# Altium PCB PCB1.PcbDoc (part 3 of 5)
Units mil, origin at the board's own origin, x right, y up, seen from the top; angles counter-clockwise.
Board outline 1280 x 1960 mil, 2 copper layers (Top Layer, Bottom Layer); 43 components, 63 nets, 300 pads, 93 vias.
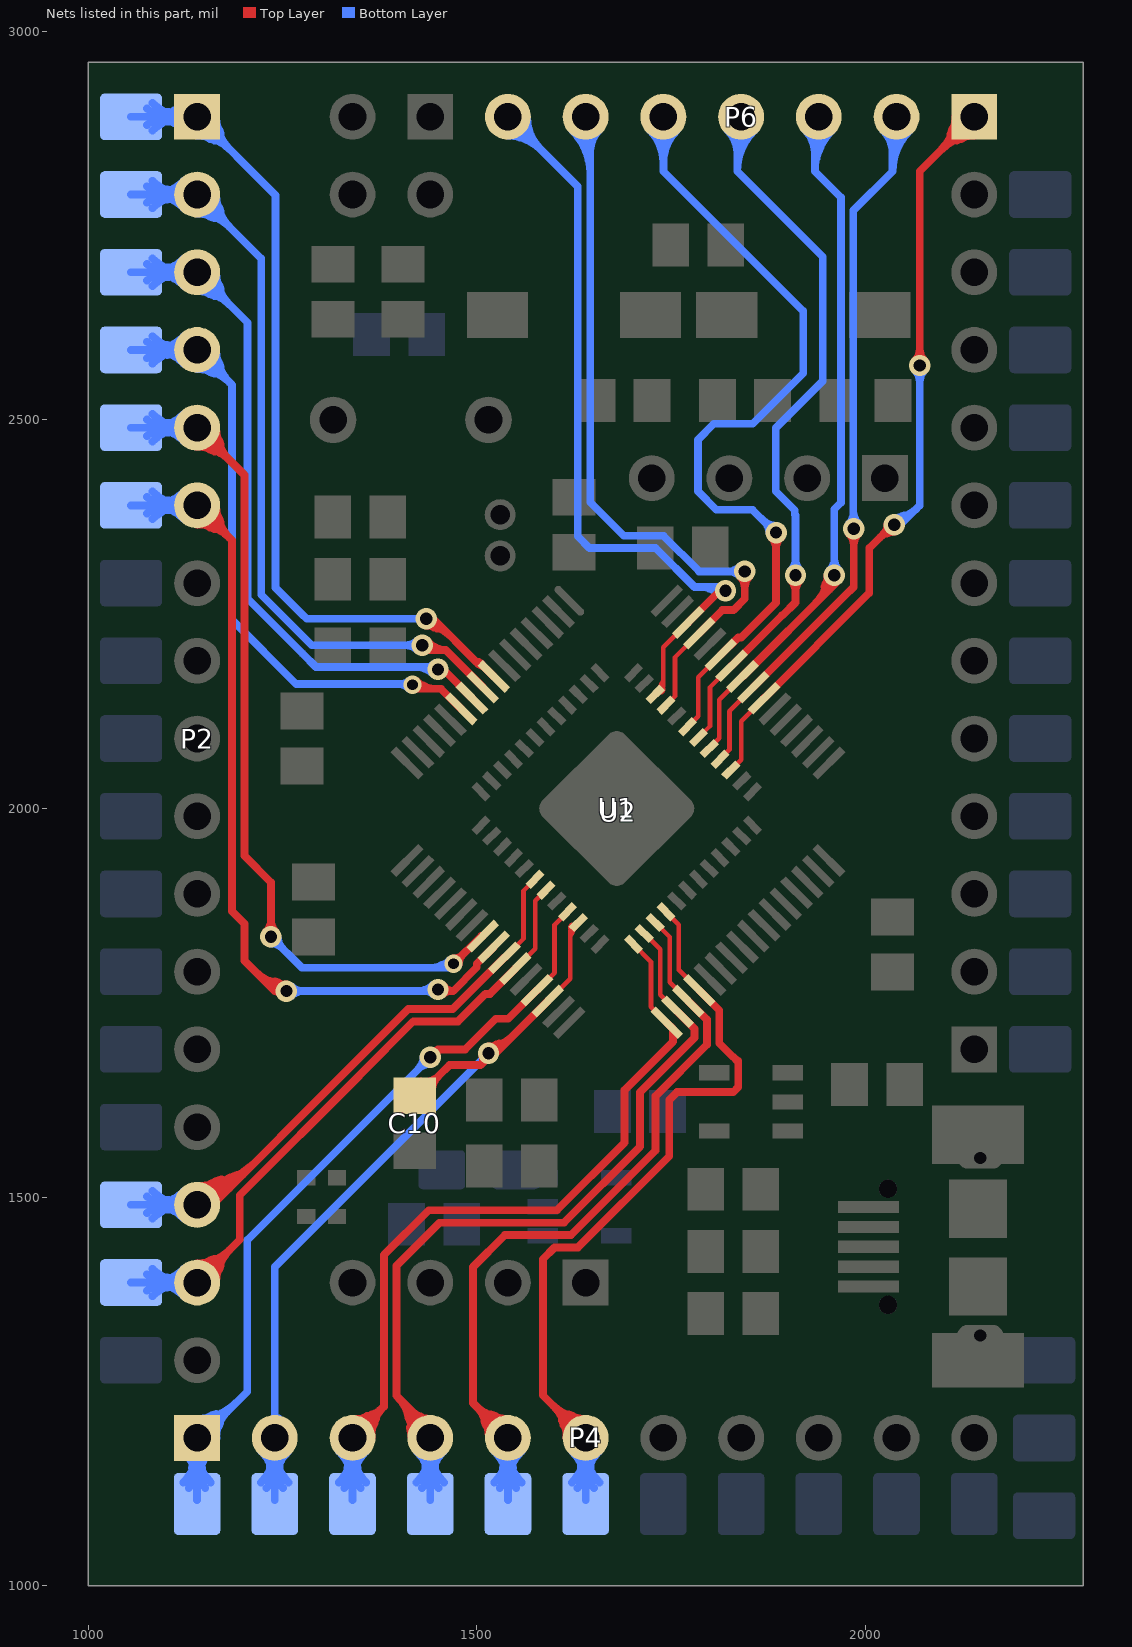
[diagram p3: the nets of this part, all layers, seen from the top]

## Via types
v1: diameter 27.56, hole 15.75, Top Layer to Bottom Layer, tented both sides, 87 vias
v2: diameter 23.62, hole 13.78, Top Layer to Bottom Layer, tented both sides, 6 vias

## Nets (pads, with @x,y where several pads share a name; then routed paths per layer and width w, separated by ;. In a path a pad name is that pad's centre, name@x,y a point inside that pad or via, vN(x,y) a via of type N, cw(c..) or ccw(c..) an arc to the next point about the centre after c; other vN are vias at no path point) (continued)
PB0: P2.15 pad.1@1055,1490 U1.18 U2.26 | length 2203.2
  Top Layer w6: U2.26@1535.52,1807.9 1560,1832.38 1560,1893.92 U1.18@1574.91,1908.83
  Top Layer w10: P2.15@1135.03,1492.3 cw(c1186.01,1468.71) 1171.47,1522.96 ; P2.15@1140,1490 1160,1490 1333,1663 1333,1663.25 1411.75,1742 1469.07,1742 1534.97,1807.9 U2.26@1535.52,1807.9 ; P2.15@1144.11,1488.1 cw(c1211.26,1457.02) 1192.11,1528.49 ; P2.15@1144.3,1488.59 cw(c1178.9,1477.26) 1169.48,1512.43 ; P2.15@1140,1494.53 ccw(c1140,1553.74) 1181.87,1511.87 cw(c1140,1553.74) P2.15@1140,1494.53 ; P2.15@1140,1504.53 ccw(c1140,1587.88) 1198.94,1528.94 cw(c1140,1587.88) P2.15@1140,1504.53 ; P2.15@1140,1514.53 ccw(c1140,1622.03) 1216.01,1546.01 cw(c1140,1622.03) P2.15@1140,1514.53
  Bottom Layer w10: pad.1@1055,1490 P2.15@1140,1490 ; P2.15@1116.78,1482.1 ccw(c1095.78,1474.96) 1101.52,1496.39 ccw(c1105.72,1512.07) P2.15@1119.38,1503.28 ; P2.15@1116.78,1497.9 cw(c1095.78,1505.04) 1101.52,1483.61 cw(c1105.72,1467.93) P2.15@1119.38,1476.72 ; pad.1@1080.79,1490 cw(c1080.79,1430.79) 1122.66,1472.66 ccw(c1080.79,1430.79) pad.1@1080.79,1490 ; pad.1@1080.79,1490 ccw(c1080.79,1549.21) 1122.66,1507.34 cw(c1080.79,1549.21) pad.1@1080.79,1490 ; pad.1@1086.36,1477.01 cw(c1099.56,1468.97) 1103.56,1483.9 ; pad.1@1086.36,1477.01 cw(c1099.56,1468.97) 1103.56,1483.9 ; pad.1@1086.36,1477.01 cw(c1099.56,1468.97) 1103.56,1483.9 ; pad.1@1086.36,1502.99 ccw(c1099.56,1511.03) 1103.56,1496.1 ; pad.1@1086.36,1502.99 ccw(c1099.56,1511.03) 1103.56,1496.1 ; pad.1@1086.36,1502.99 ccw(c1099.56,1511.03) 1103.56,1496.1 ; pad.1@1088.73,1482.12 cw(c1109.12,1475.35) 1103.56,1496.1 ; pad.1@1088.73,1482.12 cw(c1109.12,1475.35) 1103.56,1496.1 ; pad.1@1088.73,1482.12 cw(c1109.12,1475.35) 1103.56,1496.1 ; pad.1@1088.73,1497.88 ccw(c1109.12,1504.65) 1103.56,1483.9 ; pad.1@1088.73,1497.88 ccw(c1109.12,1504.65) 1103.56,1483.9 ; pad.1@1088.73,1497.88 ccw(c1109.12,1504.65) 1103.56,1483.9 ; 1101.21,1490 cw(c1101.21,1526.21) 1075.61,1500.61 ccw(c1101.21,1526.21) 1101.21,1490 ; 1101.21,1490 ccw(c1101.21,1453.79) 1075.61,1479.39 cw(c1101.21,1453.79) 1101.21,1490 ; 1104.93,1490 cw(c1104.93,1454.93) 1129.73,1479.73 ccw(c1104.93,1454.93) 1104.93,1490 ; 1104.93,1490 ccw(c1104.93,1525.07) 1129.73,1500.27 cw(c1104.93,1525.07) 1104.93,1490 ; P2.15@1125.36,1490 cw(c1125.36,1550.36) 1082.68,1507.68 ccw(c1125.36,1550.36) P2.15@1125.36,1490 ; P2.15@1125.36,1490 ccw(c1125.36,1429.64) 1082.68,1472.32 cw(c1125.36,1429.64) P2.15@1125.36,1490
PB1: P2.16 pad.1@1055,1390 U1.19 U2.27 | length 2124.8
  Top Layer w6: U2.27@1549.44,1793.98 1575,1819.54 1575,1881.08 U1.19@1588.83,1894.91
  Top Layer w10: P2.16@1134.64,1391.1 cw(c1172.3,1383.39) 1162.35,1420.52 ; P2.16@1140,1390 1195,1445 1195,1502.37 1349,1656.37 1349,1656.63 1418.37,1726 1475.7,1726 1511.03,1761.32 1516.79,1761.32 U2.27@1549.44,1793.98 ; P2.16@1141.1,1384.64 ccw(c1133.39,1422.3) 1170.52,1412.35 ; 1164.8,1414.8 cw(c1140,1439.6) 1140,1404.53 ccw(c1140,1439.6) 1164.8,1414.8 ; 1164.8,1414.8 ccw(c1189.6,1390) 1154.53,1390 cw(c1189.6,1390) 1164.8,1414.8 ; 1181.87,1431.87 cw(c1140,1473.74) 1140,1414.53 ccw(c1140,1473.74) 1181.87,1431.87 ; 1181.87,1431.87 ccw(c1223.74,1390) 1164.53,1390 cw(c1223.74,1390) 1181.87,1431.87
  Bottom Layer w10: pad.1@1055,1390 P2.16@1140,1390 ; P2.16@1116.78,1382.1 ccw(c1095.78,1374.96) 1101.52,1396.39 ccw(c1105.72,1412.07) P2.16@1119.38,1403.28 ; P2.16@1116.78,1397.9 cw(c1095.78,1405.04) 1101.52,1383.61 cw(c1105.72,1367.93) P2.16@1119.38,1376.72 ; pad.1@1080.79,1390 cw(c1080.79,1330.79) 1122.66,1372.66 ccw(c1080.79,1330.79) pad.1@1080.79,1390 ; pad.1@1080.79,1390 ccw(c1080.79,1449.21) 1122.66,1407.34 cw(c1080.79,1449.21) pad.1@1080.79,1390 ; pad.1@1086.36,1377.01 cw(c1099.56,1368.97) 1103.56,1383.9 ; pad.1@1086.36,1377.01 cw(c1099.56,1368.97) 1103.56,1383.9 ; pad.1@1086.36,1377.01 cw(c1099.56,1368.97) 1103.56,1383.9 ; pad.1@1086.36,1402.99 ccw(c1099.56,1411.03) 1103.56,1396.1 ; pad.1@1086.36,1402.99 ccw(c1099.56,1411.03) 1103.56,1396.1 ; pad.1@1086.36,1402.99 ccw(c1099.56,1411.03) 1103.56,1396.1 ; pad.1@1088.73,1382.12 cw(c1109.12,1375.35) 1103.56,1396.1 ; pad.1@1088.73,1382.12 cw(c1109.12,1375.35) 1103.56,1396.1 ; pad.1@1088.73,1382.12 cw(c1109.12,1375.35) 1103.56,1396.1 ; pad.1@1088.73,1397.88 ccw(c1109.12,1404.65) 1103.56,1383.9 ; pad.1@1088.73,1397.88 ccw(c1109.12,1404.65) 1103.56,1383.9 ; pad.1@1088.73,1397.88 ccw(c1109.12,1404.65) 1103.56,1383.9 ; 1101.21,1390 cw(c1101.21,1426.21) 1075.61,1400.61 ccw(c1101.21,1426.21) 1101.21,1390 ; 1101.21,1390 ccw(c1101.21,1353.79) 1075.61,1379.39 cw(c1101.21,1353.79) 1101.21,1390 ; 1104.93,1390 cw(c1104.93,1354.93) 1129.73,1379.73 ccw(c1104.93,1354.93) 1104.93,1390 ; 1104.93,1390 ccw(c1104.93,1425.07) 1129.73,1400.27 cw(c1104.93,1425.07) 1104.93,1390 ; P2.16@1125.36,1390 cw(c1125.36,1450.36) 1082.68,1407.68 ccw(c1125.36,1450.36) P2.16@1125.36,1390 ; P2.16@1125.36,1390 ccw(c1125.36,1329.64) 1082.68,1372.32 cw(c1125.36,1329.64) P2.16@1125.36,1390
PB3: P6.1 U1.39 U2.55 | length 1661.6
  Top Layer w6: U1.39@1826.85,2049.41 1840,2062.56 1840,2112.37 U2.55@1869.59,2141.96
  Top Layer w10: U2.55@1869.59,2141.96 2005,2277.37 2005,2335 v1@2035,2365 ; 2026.83,2353.5 ccw(c2022.66,2369.08) v1@2038.17,2364.67 ; v1(2070,2570) 2070,2820 P6.1@2140,2890 ; 2109.48,2867.65 cw(c2146.61,2857.7) P6.1@2138.9,2895.36 ; 2117.65,2859.48 ccw(c2107.7,2896.61) P6.1@2145.36,2888.9 ; 2070,2591.2 cw(c2048.8,2591.2) 2063.79,2576.21 ccw(c2048.8,2591.2) 2070,2591.2 ; 2070,2591.2 ccw(c2091.2,2591.2) 2076.21,2576.21 cw(c2091.2,2591.2) 2070,2591.2 ; 2098.13,2848.13 cw(c2140,2806.26) 2140,2865.47 ccw(c2140,2806.26) 2098.13,2848.13 ; 2098.13,2848.13 ccw(c2056.26,2890) 2115.47,2890 cw(c2056.26,2890) 2098.13,2848.13 ; P6.1@2115.2,2865.2 cw(c2140,2840.4) 2140,2875.47 ccw(c2140,2840.4) P6.1@2115.2,2865.2 ; P6.1@2115.2,2865.2 ccw(c2090.4,2890) 2125.47,2890 cw(c2090.4,2890) P6.1@2115.2,2865.2 ; 2018.6,2348.6 cw(c2037,2330.2) 2037,2356.22 ccw(c2037,2330.2) 2018.6,2348.6 ; 2023.43,2353.43 ccw(c2011.85,2365) 2028.22,2365 cw(c2011.85,2365) 2023.43,2353.43
  Bottom Layer w10: v1@2035,2365 2045,2365 2070,2390 v1(2070,2570) v1@2070,2575 ; v1@2035.9,2365.54 cw(c2056.01,2355.7) 2050.21,2377.32 ; 2070,2548.8 cw(c2091.2,2548.8) 2076.21,2563.79 ccw(c2091.2,2548.8) 2070,2548.8 ; 2070,2548.8 ccw(c2048.8,2548.8) 2063.79,2563.79 cw(c2048.8,2548.8) 2070,2548.8 ; v1@2037,2373.78 ccw(c2037,2414.29) 2065.64,2385.64 cw(c2037,2414.29) v1@2037,2373.78
  other v1: 2037,2365
PB4: P6.2 U1.40 U2.56 | length 1311.1
  Top Layer w6: U1.40@1812.93,2063.33 1825,2075.4 1825,2125.21 U2.56@1855.67,2155.88
  Top Layer w10: U2.56@1855.67,2155.88 1980,2280.21 1980.21,2280.21 1985,2285 v1(1985,2360) ; 1985,2338.8 cw(c2006.2,2338.8) 1991.21,2353.79 ccw(c2006.2,2338.8) 1985,2338.8 ; 1985,2338.8 ccw(c1963.8,2338.8) 1978.79,2353.79 cw(c1963.8,2338.8) 1985,2338.8
  Bottom Layer w10: v1(1985,2360) 1984.47,2360.53 1984.47,2769.47 2035,2820 P6.2@2035,2885 ; v1@1978.79,2366.21 ccw(c1965.08,2379.92) 1984.47,2379.92 cw(c1965.08,2379.92) v1@1978.79,2366.21 ; 1984.47,2382.47 ccw(c2007.47,2382.47) 1991.21,2366.21 cw(c2007.47,2382.47) 1984.47,2382.47 ; P6.2@2022.66,2872.66 cw(c1992.86,2842.86) 2035,2842.86 ccw(c1992.86,2842.86) P6.2@2022.66,2872.66 ; 2035,2819.83 cw(c2108.62,2819.83) 2057.15,2872.46 ccw(c2108.62,2819.83) 2035,2819.83 ; 2035,2843.59 cw(c2085.38,2843.59) 2050.16,2879.61 ccw(c2085.38,2843.59) 2035,2843.59
PB5: P6.3 U1.41 U2.57 | length 1359.7
  Top Layer w6: U1.41@1799.01,2077.25 1812,2090.24 1812,2140.05 U2.57@1841.75,2169.8
  Top Layer w10: U2.57@1841.75,2169.8 v1@1961.95,2290 ; 1947.27,2285.27 cw(c1972.39,2278.53) v1@1959.39,2301.06 ; 1936.56,2264.62 ccw(c1901.18,2300) 1951.22,2300 cw(c1901.18,2300) 1936.56,2264.62 ; 1953.64,2281.69 ccw(c1935.32,2300) 1961.22,2300 cw(c1935.32,2300) 1953.64,2281.69
  Bottom Layer w10: P6.3@1940,2890 1935,2885 1935,2820 1968.47,2786.53 1968.47,2393.47 1960,2385 v1(1960,2300) ; 1960,2321.2 cw(c1938.8,2321.2) 1953.79,2306.21 ccw(c1938.8,2321.2) 1960,2321.2 ; 1960,2321.2 ccw(c1981.2,2321.2) 1966.21,2306.21 cw(c1981.2,2321.2) 1960,2321.2 ; P6.3@1922.66,2872.66 cw(c1892.86,2842.86) 1935,2842.86 ccw(c1892.86,2842.86) P6.3@1922.66,2872.66 ; 1935,2819.83 cw(c2008.62,2819.83) 1957.15,2872.46 ccw(c2008.62,2819.83) 1935,2819.83 ; 1935,2843.59 cw(c1985.38,2843.59) 1950.16,2879.61 ccw(c1985.38,2843.59) 1935,2843.59
PB6: P6.4 U1.42 U2.58 | length 1331.3
  Top Layer w6: U1.42@1785.09,2091.17 1800,2106.08 1800,2155.89 U2.58@1827.83,2183.72
  Top Layer w10: U2.58@1827.83,2183.72 1892.78,2248.67 1893.67,2248.67 1910,2265 v1(1910,2300) ; 1910,2278.8 cw(c1931.2,2278.8) 1916.21,2293.79 ccw(c1931.2,2278.8) 1910,2278.8 ; 1910,2278.8 ccw(c1888.8,2278.8) 1903.79,2293.79 cw(c1888.8,2278.8) 1910,2278.8
  Bottom Layer w10: P6.4@1840,2890 1835,2885 1835,2820 1945,2710 1945,2550 1884.47,2489.47 1884.47,2408.21 1909,2383.69 1909,2378.37 1910,2377.37 v1(1910,2300) ; 1910,2321.2 cw(c1888.8,2321.2) 1903.79,2306.21 ccw(c1888.8,2321.2) 1910,2321.2 ; 1910,2321.2 ccw(c1931.2,2321.2) 1916.21,2306.21 cw(c1931.2,2321.2) 1910,2321.2 ; P6.4@1822.66,2872.66 cw(c1792.86,2842.86) 1835,2842.86 ccw(c1792.86,2842.86) P6.4@1822.66,2872.66 ; 1835,2819.83 cw(c1908.62,2819.83) 1857.15,2872.46 ccw(c1908.62,2819.83) 1835,2819.83 ; 1835,2843.59 cw(c1885.38,2843.59) 1850.16,2879.61 ccw(c1885.38,2843.59) 1835,2843.59
PB7: P6.5 U1.43 U2.59 | length 1479.4
  Top Layer w6: U1.43@1771.17,2105.09 1785,2118.92 1785,2168.73 U2.59@1813.91,2197.64
  Top Layer w10: U2.59@1813.91,2197.64 1836.27,2220 1840.3,2220 1885,2264.7 v1(1885,2355) ; 1885,2333.8 cw(c1906.2,2333.8) 1891.21,2348.79 ccw(c1906.2,2333.8) 1885,2333.8 ; 1885,2333.8 ccw(c1863.8,2333.8) 1878.79,2348.79 cw(c1863.8,2333.8) 1885,2333.8
  Bottom Layer w10: P6.5@1740,2890 1740,2820 1920,2640 1920,2560 1855,2495 1805,2495 1784.47,2474.47 1784.47,2408.21 1808.21,2384.47 1854.57,2384.47 v1@1875,2364.04 ; 1740,2830.79 cw(c1799.21,2830.79) 1757.34,2872.66 ccw(c1799.21,2830.79) 1740,2830.79 ; 1740,2830.79 ccw(c1680.79,2830.79) 1722.66,2872.66 cw(c1680.79,2830.79) 1740,2830.79 ; 1740,2854.93 cw(c1775.07,2854.93) 1750.27,2879.73 ccw(c1775.07,2854.93) 1740,2854.93 ; 1740,2854.93 ccw(c1704.93,2854.93) 1729.73,2879.73 cw(c1704.93,2854.93) 1740,2854.93 ; 1868.38,2370.66 ccw(c1885,2387.28) 1885,2363.78 cw(c1885,2387.28) 1868.38,2370.66 ; 1870.69,2368.35 cw(c1857.33,2355) 1876.22,2355 ccw(c1857.33,2355) 1870.69,2368.35
PB8: P6.6 U1.45 U2.61 | length 1362
  Top Layer w6: U1.45@1743.33,2132.93 1755,2144.6 1755,2194.41 U2.61@1786.07,2225.48
  Top Layer w10: U2.61@1786.07,2225.48 1815.81,2255.22 1830.26,2255.22 1844.78,2269.74 v1(1844.78,2305) ; 1844.78,2283.8 cw(c1865.98,2283.8) 1850.99,2298.79 ccw(c1865.98,2283.8) 1844.78,2283.8 ; 1844.78,2283.8 ccw(c1823.58,2283.8) 1838.57,2298.79 cw(c1823.58,2283.8) 1844.78,2283.8
  Bottom Layer w10: P6.6@1640,2890 1645.78,2884.22 1645.78,2394.22 1689,2351 1740,2351 1786,2305 v1(1844.78,2305) ; 1823.58,2305 cw(c1823.58,2283.8) 1838.57,2298.79 ccw(c1823.58,2283.8) 1823.58,2305 ; 1823.58,2305 ccw(c1823.58,2326.2) 1838.57,2311.21 cw(c1823.58,2326.2) 1823.58,2305 ; P6.6@1622.66,2872.66 cw(c1566.83,2816.83) 1645.78,2816.83 ccw(c1566.83,2816.83) P6.6@1622.66,2872.66 ; P6.6@1629.73,2879.73 cw(c1590.97,2840.97) 1645.78,2840.97 ccw(c1590.97,2840.97) P6.6@1629.73,2879.73 ; 1645.78,2844.74 cw(c1685.26,2844.74) 1657.34,2872.66 ccw(c1685.26,2844.74) 1645.78,2844.74
PB9: P6.7 U1.46 U2.62 | length 1240.7
  Top Layer w6: U1.46@1729.41,2146.85 1740,2157.44 1740,2207.25 U2.62@1772.15,2239.4 ; U1.46@1736.84,2152.92 cw(c1747.44,2155.76) 1737.93,2161.24 ; U1.46@1733.62,2153.78 ccw(c1718.23,2169.17) 1740,2169.17 cw(c1718.23,2169.17) U1.46@1733.62,2153.78 ; U1.46@1737.87,2149.53 ccw(c1732.71,2154.69) 1740,2154.69 cw(c1732.71,2154.69) U1.46@1737.87,2149.53
  Top Layer w10: U2.62@1772.15,2239.4 1812.75,2280 v1(1820,2280)
  Bottom Layer w10: P6.7@1535,2885 P6.7@1540,2890 1629.78,2800.22 1629.78,2350.22 1645,2335 1730,2335 1780,2285 1815,2285 v1(1820,2280) ; P6.7@1540,2865.47 cw(c1540,2806.26) 1581.87,2848.13 cw(c1623.74,2890) P6.7@1564.53,2890 ; P6.7@1540,2875.47 cw(c1540,2840.4) 1564.8,2865.2 cw(c1589.6,2890) P6.7@1554.53,2890 ; 1786.73,2285 cw(c1786.73,2246.73) 1813.79,2273.79 ccw(c1786.73,2246.73) 1786.73,2285
PB10: P4.1 pad.1@1140,1105 U1.21 U2.29 | length 2376.1
  Top Layer w6: U2.29@1577.28,1766.14 1600,1788.86 1600,1850.4 U1.21@1616.67,1867.07
  Top Layer w10: v1(1440,1680) 1450,1690 ; U2.29@1577.28,1766.14 1540.46,1729.32 1524.28,1729.32 1484.96,1690 1450,1690 ; 1450,1690 cw(c1445.05,1694.95) 1442.81,1688.32 ccw(c1445.05,1694.95) 1450,1690 ; 1450,1690 ccw(c1454.95,1685.05) 1448.32,1682.81 cw(c1454.95,1685.05) 1450,1690
  Bottom Layer w10: P4.1@1126.72,1169.38 cw(c1117.93,1155.72) 1133.61,1151.52 cw(c1155.04,1145.78) P4.1@1147.9,1166.78 ; P4.1@1132.1,1166.78 cw(c1124.96,1145.78) 1146.39,1151.52 cw(c1162.07,1155.72) P4.1@1153.28,1169.38 ; P4.1@1134.73,1191.46 cw(c1175.6,1180.16) 1164.63,1221.13 ; pad.1@1140,1110 P4.1@1140,1190 ; P4.1@1140.69,1184.57 ccw(c1136.32,1219.07) 1169.9,1210.07 ; P4.1@1165,1190 1145,1190 1204.55,1249.55 1204.55,1444.55 v1(1440,1680) ; pad.1@1127.01,1136.36 ccw(c1118.97,1149.56) 1133.9,1153.56 ; pad.1@1127.01,1136.36 ccw(c1118.97,1149.56) 1133.9,1153.56 ; pad.1@1127.01,1136.36 ccw(c1118.97,1149.56) 1133.9,1153.56 ; pad.1@1132.12,1138.73 ccw(c1125.35,1159.12) 1146.1,1153.56 ; pad.1@1132.12,1138.73 ccw(c1125.35,1159.12) 1146.1,1153.56 ; pad.1@1132.12,1138.73 ccw(c1125.35,1159.12) 1146.1,1153.56 ; 1133.9,1153.56 ccw(c1154.65,1159.12) pad.1@1147.88,1138.73 ; 1133.9,1153.56 ccw(c1154.65,1159.12) pad.1@1147.88,1138.73 ; 1133.9,1153.56 ccw(c1154.65,1159.12) pad.1@1147.88,1138.73 ; pad.1@1140,1130.79 cw(c1199.21,1130.79) 1157.34,1172.66 ccw(c1199.21,1130.79) pad.1@1140,1130.79 ; pad.1@1140,1130.79 ccw(c1080.79,1130.79) 1122.66,1172.66 cw(c1080.79,1130.79) pad.1@1140,1130.79 ; 1140,1151.21 cw(c1103.79,1151.21) 1129.39,1125.61 ccw(c1103.79,1151.21) 1140,1151.21 ; 1140,1151.21 ccw(c1176.21,1151.21) 1150.61,1125.61 cw(c1176.21,1151.21) 1140,1151.21 ; 1140,1154.93 cw(c1175.07,1154.93) 1150.27,1179.73 ccw(c1175.07,1154.93) 1140,1154.93 ; 1140,1154.93 ccw(c1104.93,1154.93) 1129.73,1179.73 cw(c1104.93,1154.93) 1140,1154.93 ; P4.1@1140,1175.36 cw(c1079.64,1175.36) 1122.32,1132.68 ccw(c1079.64,1175.36) P4.1@1140,1175.36 ; P4.1@1140,1175.36 ccw(c1200.36,1175.36) 1157.68,1132.68 cw(c1200.36,1175.36) P4.1@1140,1175.36 ; 1146.1,1153.56 ccw(c1161.03,1149.56) pad.1@1152.99,1136.36 ; 1146.1,1153.56 ccw(c1161.03,1149.56) pad.1@1152.99,1136.36 ; 1146.1,1153.56 ccw(c1161.03,1149.56) pad.1@1152.99,1136.36 ; 1425.01,1665.01 cw(c1440,1650.02) 1440,1671.22 ccw(c1440,1650.02) 1425.01,1665.01 ; 1425.01,1665.01 ccw(c1410.02,1680) 1431.22,1680 cw(c1410.02,1680) 1425.01,1665.01 ; P4.1@1140,1204.53 ccw(c1140,1251.67) 1173.34,1218.34 cw(c1140,1251.67) P4.1@1140,1204.53 ; P4.1@1140,1214.53 ccw(c1140,1285.81) 1190.41,1235.41 cw(c1140,1285.81) P4.1@1140,1214.53 ; P4.1@1164.53,1190 cw(c1211.67,1190) 1178.34,1223.34 ccw(c1211.67,1190) P4.1@1164.53,1190
PB11: C10.2 P4.2 pad.1@1240,1105 U1.22 U2.30 | length 2394.6
  Top Layer w6: U2.30@1591.2,1752.22 1620,1781.02 1620,1842.56 U1.22@1630.59,1853.15 ; 1622.07,1838.76 ccw(c1612.56,1844.24) U1.22@1623.16,1847.08 ; 1620,1830.83 cw(c1641.77,1830.83) 1626.38,1846.22 ccw(c1641.77,1830.83) 1620,1830.83 ; 1620,1840.49 cw(c1625.18,1840.49) 1625.06,1845.66 ccw(c1625.18,1840.49) 1620,1840.49 ; 1620,1845.31 cw(c1627.29,1845.31) 1622.13,1850.47 ccw(c1627.29,1845.31) 1620,1845.31
  Top Layer w10: C10.2@1420,1630.43 1425.48,1630.43 1450.26,1655.22 ; 1464.78,1669.74 1450.26,1655.22 ; 1464.78,1669.78 1504.78,1669.78 ; v1@1513.92,1685.56 cw(c1534.8,1674.73) 1528.71,1697.45 ; U2.30@1591.2,1752.22 1523.98,1685 v1(1515,1685) 1515,1680 1504.78,1669.78 ; C10.2@1427.88,1648.63 ccw(c1433.03,1672.45) 1450.26,1655.22 ; C10.2@1427.88,1648.63 ccw(c1433.03,1672.45) 1450.26,1655.22 ; C10.2@1427.88,1648.63 ccw(c1433.03,1672.45) 1450.26,1655.22 ; C10.2@1427.88,1648.63 ccw(c1433.03,1672.45) 1450.26,1655.22 ; C10.2@1442.43,1632.63 cw(c1469.63,1635.85) 1450.26,1655.22 ; C10.2@1442.43,1632.63 cw(c1469.63,1635.85) 1450.26,1655.22 ; C10.2@1442.43,1632.63 cw(c1469.63,1635.85) 1450.26,1655.22 ; C10.2@1442.43,1632.63 cw(c1469.63,1635.85) 1450.26,1655.22 ; 1504.78,1669.78 ccw(c1497.34,1677.22) 1506.97,1681.46 cw(c1497.34,1677.22) 1504.78,1669.78 ; v1@1515,1683.78 ccw(c1515,1702.51) 1528.25,1689.27 cw(c1515,1702.51) v1@1515,1683.78 ; v1@1515,1693.78 ccw(c1515,1736.65) 1545.32,1706.34 cw(c1515,1736.65) v1@1515,1693.78
  Bottom Layer w10: P4.2@1226.72,1169.38 cw(c1217.93,1155.72) 1233.61,1151.52 cw(c1255.04,1145.78) P4.2@1247.9,1166.78 ; P4.2@1232.1,1166.78 cw(c1224.96,1145.78) 1246.39,1151.52 cw(c1262.07,1155.72) P4.2@1253.28,1169.38 ; pad.1@1240,1110 P4.2@1240,1190 1240,1410 v1(1515,1685) ; P4.2@1245,1190 P4.2@1245,1215 ; pad.1@1227.01,1136.36 ccw(c1218.97,1149.56) 1233.9,1153.56 ; pad.1@1227.01,1136.36 ccw(c1218.97,1149.56) 1233.9,1153.56 ; pad.1@1227.01,1136.36 ccw(c1218.97,1149.56) 1233.9,1153.56 ; pad.1@1232.12,1138.73 ccw(c1225.35,1159.12) 1246.1,1153.56 ; pad.1@1232.12,1138.73 ccw(c1225.35,1159.12) 1246.1,1153.56 ; pad.1@1232.12,1138.73 ccw(c1225.35,1159.12) 1246.1,1153.56 ; 1233.9,1153.56 ccw(c1254.65,1159.12) pad.1@1247.88,1138.73 ; 1233.9,1153.56 ccw(c1254.65,1159.12) pad.1@1247.88,1138.73 ; 1233.9,1153.56 ccw(c1254.65,1159.12) pad.1@1247.88,1138.73 ; pad.1@1240,1130.79 cw(c1299.21,1130.79) 1257.34,1172.66 ccw(c1299.21,1130.79) pad.1@1240,1130.79 ; pad.1@1240,1130.79 ccw(c1180.79,1130.79) 1222.66,1172.66 cw(c1180.79,1130.79) pad.1@1240,1130.79 ; 1240,1151.21 cw(c1203.79,1151.21) 1229.39,1125.61 ccw(c1203.79,1151.21) 1240,1151.21 ; 1240,1151.21 ccw(c1276.21,1151.21) 1250.61,1125.61 cw(c1276.21,1151.21) 1240,1151.21 ; 1240,1154.93 cw(c1275.07,1154.93) 1250.27,1179.73 ccw(c1275.07,1154.93) 1240,1154.93 ; 1240,1154.93 ccw(c1204.93,1154.93) 1229.73,1179.73 cw(c1204.93,1154.93) 1240,1154.93 ; P4.2@1240,1175.36 cw(c1179.64,1175.36) 1222.32,1132.68 ccw(c1179.64,1175.36) P4.2@1240,1175.36 ; P4.2@1240,1175.36 ccw(c1300.36,1175.36) 1257.68,1132.68 cw(c1300.36,1175.36) P4.2@1240,1175.36 ; 1246.1,1153.56 ccw(c1261.03,1149.56) pad.1@1252.99,1136.36 ; 1246.1,1153.56 ccw(c1261.03,1149.56) pad.1@1252.99,1136.36 ; 1246.1,1153.56 ccw(c1261.03,1149.56) pad.1@1252.99,1136.36
PB12: P4.3 pad.1@1340,1105 U1.25 U2.33 | length 2297.3
  Top Layer w6: U1.25@1701.58,1825.31 1724,1802.89 1724,1744.69 U2.33@1744.31,1724.38
  Top Layer w10: P4.3@1334.74,1191.5 cw(c1374,1180.33) 1364.74,1220.09 ; P4.3@1340,1190 1380,1230 ; P4.3@1341.5,1184.74 ccw(c1330.33,1224) 1370.09,1214.74 ; 1380.53,1230 1380.53,1425.53 1438,1483 1603,1483 1690,1570 1690,1637.63 1752.37,1700 1752.37,1716.32 U2.33@1744.31,1724.38 ; 1363.69,1213.69 cw(c1341.51,1235.87) 1340.48,1204.52 ccw(c1341.51,1235.87) 1363.69,1213.69 ; 1363.69,1213.69 ccw(c1385.87,1191.51) 1354.52,1190.48 cw(c1385.87,1191.51) 1363.69,1213.69 ; 1380,1230 cw(c1342.55,1267.45) 1340.81,1214.51 ccw(c1342.55,1267.45) 1380,1230 ; 1380,1230 ccw(c1417.45,1192.55) 1364.51,1190.81 cw(c1417.45,1192.55) 1380,1230
  Bottom Layer w10: P4.3@1326.72,1169.38 cw(c1317.93,1155.72) 1333.61,1151.52 cw(c1355.04,1145.78) P4.3@1347.9,1166.78 ; P4.3@1332.1,1166.78 cw(c1324.96,1145.78) 1346.39,1151.52 cw(c1362.07,1155.72) P4.3@1353.28,1169.38 ; pad.1@1340,1110 P4.3@1340,1190 ; pad.1@1327.01,1136.36 ccw(c1318.97,1149.56) 1333.9,1153.56 ; pad.1@1327.01,1136.36 ccw(c1318.97,1149.56) 1333.9,1153.56 ; pad.1@1327.01,1136.36 ccw(c1318.97,1149.56) 1333.9,1153.56 ; pad.1@1332.12,1138.73 ccw(c1325.35,1159.12) 1346.1,1153.56 ; pad.1@1332.12,1138.73 ccw(c1325.35,1159.12) 1346.1,1153.56 ; pad.1@1332.12,1138.73 ccw(c1325.35,1159.12) 1346.1,1153.56 ; 1333.9,1153.56 ccw(c1354.65,1159.12) pad.1@1347.88,1138.73 ; 1333.9,1153.56 ccw(c1354.65,1159.12) pad.1@1347.88,1138.73 ; 1333.9,1153.56 ccw(c1354.65,1159.12) pad.1@1347.88,1138.73 ; pad.1@1340,1130.79 cw(c1399.21,1130.79) 1357.34,1172.66 ccw(c1399.21,1130.79) pad.1@1340,1130.79 ; pad.1@1340,1130.79 ccw(c1280.79,1130.79) 1322.66,1172.66 cw(c1280.79,1130.79) pad.1@1340,1130.79 ; 1340,1151.21 cw(c1303.79,1151.21) 1329.39,1125.61 ccw(c1303.79,1151.21) 1340,1151.21 ; 1340,1151.21 ccw(c1376.21,1151.21) 1350.61,1125.61 cw(c1376.21,1151.21) 1340,1151.21 ; 1340,1154.93 cw(c1375.07,1154.93) 1350.27,1179.73 ccw(c1375.07,1154.93) 1340,1154.93 ; 1340,1154.93 ccw(c1304.93,1154.93) 1329.73,1179.73 cw(c1304.93,1154.93) 1340,1154.93 ; P4.3@1340,1175.36 cw(c1279.64,1175.36) 1322.32,1132.68 ccw(c1279.64,1175.36) P4.3@1340,1175.36 ; P4.3@1340,1175.36 ccw(c1400.36,1175.36) 1357.68,1132.68 cw(c1400.36,1175.36) P4.3@1340,1175.36 ; 1346.1,1153.56 ccw(c1361.03,1149.56) pad.1@1352.99,1136.36 ; 1346.1,1153.56 ccw(c1361.03,1149.56) pad.1@1352.99,1136.36 ; 1346.1,1153.56 ccw(c1361.03,1149.56) pad.1@1352.99,1136.36
PB13: P4.4 pad.1@1440,1105 U1.26 U2.34 | length 2373.8
  Top Layer w6: U1.26@1715.49,1839.23 1736,1818.72 1736,1760.53 U2.34@1758.23,1738.3
  Top Layer w10: 1409.75,1225.2 ccw(c1467.17,1235.31) P4.4@1437.19,1185.31 ; 1413.55,1203.63 ccw(c1452.26,1210.44) P4.4@1432.04,1176.73 ; 1420.58,1219.4 ccw(c1452.98,1225.11) P4.4@1441.57,1194.25 ; 1422.67,1219.17 cw(c1414.7,1189.45) P4.4@1445.47,1190.12 ; P4.4@1440,1190 P4.4@1440,1195 ; P4.4@1446.53,1191.53 1445,1190 P4.4@1440,1195 ; U2.34@1758.23,1738.3 1780,1716.53 1780,1705 1709.87,1634.87 1709.87,1564.87 1612,1467 1452,1467 1396.53,1411.53 1396.53,1244.47 ; 1396.53,1244.47 cw(c1349.96,1197.9) 1415.57,1192.14 ccw(c1349.96,1197.9) 1396.53,1244.47 ; 1396.53,1244.47 1440,1201 P4.4@1440,1195 ; 1411.69,1229.31 cw(c1377.83,1195.46) 1425.53,1191.27 ccw(c1377.83,1195.46) 1411.69,1229.31 ; 1416.91,1224.09 ccw(c1440,1247.19) 1440,1214.53 cw(c1440,1247.19) 1416.91,1224.09
  Bottom Layer w10: P4.4@1426.72,1169.38 cw(c1417.93,1155.72) 1433.61,1151.52 cw(c1455.04,1145.78) P4.4@1447.9,1166.78 ; P4.4@1432.1,1166.78 cw(c1424.96,1145.78) 1446.39,1151.52 cw(c1462.07,1155.72) P4.4@1453.28,1169.38 ; pad.1@1440,1110 P4.4@1440,1190 ; pad.1@1427.01,1136.36 ccw(c1418.97,1149.56) 1433.9,1153.56 ; pad.1@1427.01,1136.36 ccw(c1418.97,1149.56) 1433.9,1153.56 ; pad.1@1427.01,1136.36 ccw(c1418.97,1149.56) 1433.9,1153.56 ; pad.1@1432.12,1138.73 ccw(c1425.35,1159.12) 1446.1,1153.56 ; pad.1@1432.12,1138.73 ccw(c1425.35,1159.12) 1446.1,1153.56 ; pad.1@1432.12,1138.73 ccw(c1425.35,1159.12) 1446.1,1153.56 ; 1433.9,1153.56 ccw(c1454.65,1159.12) pad.1@1447.88,1138.73 ; 1433.9,1153.56 ccw(c1454.65,1159.12) pad.1@1447.88,1138.73 ; 1433.9,1153.56 ccw(c1454.65,1159.12) pad.1@1447.88,1138.73 ; pad.1@1440,1130.79 cw(c1499.21,1130.79) 1457.34,1172.66 ccw(c1499.21,1130.79) pad.1@1440,1130.79 ; pad.1@1440,1130.79 ccw(c1380.79,1130.79) 1422.66,1172.66 cw(c1380.79,1130.79) pad.1@1440,1130.79 ; 1440,1151.21 cw(c1403.79,1151.21) 1429.39,1125.61 ccw(c1403.79,1151.21) 1440,1151.21 ; 1440,1151.21 ccw(c1476.21,1151.21) 1450.61,1125.61 cw(c1476.21,1151.21) 1440,1151.21 ; 1440,1154.93 cw(c1475.07,1154.93) 1450.27,1179.73 ccw(c1475.07,1154.93) 1440,1154.93 ; 1440,1154.93 ccw(c1404.93,1154.93) 1429.73,1179.73 cw(c1404.93,1154.93) 1440,1154.93 ; P4.4@1440,1175.36 cw(c1379.64,1175.36) 1422.32,1132.68 ccw(c1379.64,1175.36) P4.4@1440,1175.36 ; P4.4@1440,1175.36 ccw(c1500.36,1175.36) 1457.68,1132.68 cw(c1500.36,1175.36) P4.4@1440,1175.36 ; 1446.1,1153.56 ccw(c1461.03,1149.56) pad.1@1452.99,1136.36 ; 1446.1,1153.56 ccw(c1461.03,1149.56) pad.1@1452.99,1136.36 ; 1446.1,1153.56 ccw(c1461.03,1149.56) pad.1@1452.99,1136.36
PB14: P4.5 pad.1@1540,1105 U1.27 U2.35 | length 2275.8
  Top Layer w6: U1.27@1729.41,1853.15 1748,1834.56 1748,1776.37 U2.35@1772.15,1752.22
  Top Layer w10: 1509.48,1212.35 ccw(c1546.61,1222.3) P4.5@1538.9,1184.64 ; 1517.65,1220.52 cw(c1507.7,1183.39) P4.5@1545.36,1191.1 ; P4.5@1540,1190 1495,1235 1495,1410 1536,1451 1621,1451 1730,1560 1730,1630 1796,1696 1796,1728.37 U2.35@1772.15,1752.22 ; 1498.13,1231.87 cw(c1456.26,1190) 1515.47,1190 ccw(c1456.26,1190) 1498.13,1231.87 ; 1498.13,1231.87 ccw(c1540,1273.74) 1540,1214.53 cw(c1540,1273.74) 1498.13,1231.87 ; 1515.2,1214.8 cw(c1490.4,1190) 1525.47,1190 ccw(c1490.4,1190) 1515.2,1214.8 ; 1515.2,1214.8 ccw(c1540,1239.6) 1540,1204.53 cw(c1540,1239.6) 1515.2,1214.8
  Bottom Layer w10: P4.5@1526.72,1169.38 cw(c1517.93,1155.72) 1533.61,1151.52 cw(c1555.04,1145.78) P4.5@1547.9,1166.78 ; P4.5@1532.1,1166.78 cw(c1524.96,1145.78) 1546.39,1151.52 cw(c1562.07,1155.72) P4.5@1553.28,1169.38 ; pad.1@1540,1110 P4.5@1540,1190 ; pad.1@1527.01,1136.36 ccw(c1518.97,1149.56) 1533.9,1153.56 ; pad.1@1527.01,1136.36 ccw(c1518.97,1149.56) 1533.9,1153.56 ; pad.1@1527.01,1136.36 ccw(c1518.97,1149.56) 1533.9,1153.56 ; pad.1@1532.12,1138.73 ccw(c1525.35,1159.12) 1546.1,1153.56 ; pad.1@1532.12,1138.73 ccw(c1525.35,1159.12) 1546.1,1153.56 ; pad.1@1532.12,1138.73 ccw(c1525.35,1159.12) 1546.1,1153.56 ; 1533.9,1153.56 ccw(c1554.65,1159.12) pad.1@1547.88,1138.73 ; 1533.9,1153.56 ccw(c1554.65,1159.12) pad.1@1547.88,1138.73 ; 1533.9,1153.56 ccw(c1554.65,1159.12) pad.1@1547.88,1138.73 ; pad.1@1540,1130.79 cw(c1599.21,1130.79) 1557.34,1172.66 ccw(c1599.21,1130.79) pad.1@1540,1130.79 ; pad.1@1540,1130.79 ccw(c1480.79,1130.79) 1522.66,1172.66 cw(c1480.79,1130.79) pad.1@1540,1130.79 ; 1540,1151.21 cw(c1503.79,1151.21) 1529.39,1125.61 ccw(c1503.79,1151.21) 1540,1151.21 ; 1540,1151.21 ccw(c1576.21,1151.21) 1550.61,1125.61 cw(c1576.21,1151.21) 1540,1151.21 ; 1540,1154.93 cw(c1575.07,1154.93) 1550.27,1179.73 ccw(c1575.07,1154.93) 1540,1154.93 ; 1540,1154.93 ccw(c1504.93,1154.93) 1529.73,1179.73 cw(c1504.93,1154.93) 1540,1154.93 ; P4.5@1540,1175.36 cw(c1479.64,1175.36) 1522.32,1132.68 ccw(c1479.64,1175.36) P4.5@1540,1175.36 ; P4.5@1540,1175.36 ccw(c1600.36,1175.36) 1557.68,1132.68 cw(c1600.36,1175.36) P4.5@1540,1175.36 ; 1546.1,1153.56 ccw(c1561.03,1149.56) pad.1@1552.99,1136.36 ; 1546.1,1153.56 ccw(c1561.03,1149.56) pad.1@1552.99,1136.36 ; 1546.1,1153.56 ccw(c1561.03,1149.56) pad.1@1552.99,1136.36
PB15: P4.6 pad.1@1640,1105 U1.28 U2.36 | length 2305
  Top Layer w6: U1.28@1743.33,1867.07 1760,1850.4 1760,1792.21 U2.36@1786.07,1766.14
  Top Layer w10: 1609.48,1212.35 ccw(c1646.61,1222.3) P4.6@1638.9,1184.64 ; 1617.65,1220.52 cw(c1607.7,1183.39) P4.6@1645.36,1191.1 ; P4.6@1629.47,1210.07 P4.6@1629.47,1200.53 ; P4.6@1640,1190 P4.6@1629.47,1200.53 ; U2.36@1786.07,1766.14 1812,1740.21 1812,1698 1829.35,1680.65 1829.75,1680.65 1835.4,1675 1836.5,1675 1836.5,1641.5 1830,1635 1757.63,1635 1747.5,1624.87 1747.5,1552.5 1630,1435 1600,1435 1585,1420 1585,1245 P4.6@1629.47,1200.53 ; 1598.13,1231.87 cw(c1556.26,1190) 1615.47,1190 ccw(c1556.26,1190) 1598.13,1231.87 ; 1598.13,1231.87 ccw(c1640,1273.74) 1640,1214.53 cw(c1640,1273.74) 1598.13,1231.87 ; 1615.2,1214.8 cw(c1590.4,1190) 1625.47,1190 ccw(c1590.4,1190) 1615.2,1214.8 ; 1615.2,1214.8 ccw(c1640,1239.6) 1640,1204.53 cw(c1640,1239.6) 1615.2,1214.8
  Bottom Layer w10: P4.6@1626.72,1169.38 cw(c1617.93,1155.72) 1633.61,1151.52 cw(c1655.04,1145.78) P4.6@1647.9,1166.78 ; P4.6@1632.1,1166.78 cw(c1624.96,1145.78) 1646.39,1151.52 cw(c1662.07,1155.72) P4.6@1653.28,1169.38 ; pad.1@1640,1110 P4.6@1640,1190 ; pad.1@1627.01,1136.36 ccw(c1618.97,1149.56) 1633.9,1153.56 ; pad.1@1627.01,1136.36 ccw(c1618.97,1149.56) 1633.9,1153.56 ; pad.1@1627.01,1136.36 ccw(c1618.97,1149.56) 1633.9,1153.56 ; pad.1@1632.12,1138.73 ccw(c1625.35,1159.12) 1646.1,1153.56 ; pad.1@1632.12,1138.73 ccw(c1625.35,1159.12) 1646.1,1153.56 ; pad.1@1632.12,1138.73 ccw(c1625.35,1159.12) 1646.1,1153.56 ; 1633.9,1153.56 ccw(c1654.65,1159.12) pad.1@1647.88,1138.73 ; 1633.9,1153.56 ccw(c1654.65,1159.12) pad.1@1647.88,1138.73 ; 1633.9,1153.56 ccw(c1654.65,1159.12) pad.1@1647.88,1138.73 ; pad.1@1640,1130.79 cw(c1699.21,1130.79) 1657.34,1172.66 ccw(c1699.21,1130.79) pad.1@1640,1130.79 ; pad.1@1640,1130.79 ccw(c1580.79,1130.79) 1622.66,1172.66 cw(c1580.79,1130.79) pad.1@1640,1130.79 ; 1640,1151.21 cw(c1603.79,1151.21) 1629.39,1125.61 ccw(c1603.79,1151.21) 1640,1151.21 ; 1640,1151.21 ccw(c1676.21,1151.21) 1650.61,1125.61 cw(c1676.21,1151.21) 1640,1151.21 ; 1640,1154.93 cw(c1675.07,1154.93) 1650.27,1179.73 ccw(c1675.07,1154.93) 1640,1154.93 ; 1640,1154.93 ccw(c1604.93,1154.93) 1629.73,1179.73 cw(c1604.93,1154.93) 1640,1154.93 ; P4.6@1640,1175.36 cw(c1579.64,1175.36) 1622.32,1132.68 ccw(c1579.64,1175.36) P4.6@1640,1175.36 ; P4.6@1640,1175.36 ccw(c1700.36,1175.36) 1657.68,1132.68 cw(c1700.36,1175.36) P4.6@1640,1175.36 ; 1646.1,1153.56 ccw(c1661.03,1149.56) pad.1@1652.99,1136.36 ; 1646.1,1153.56 ccw(c1661.03,1149.56) pad.1@1652.99,1136.36 ; 1646.1,1153.56 ccw(c1661.03,1149.56) pad.1@1652.99,1136.36
PC0: P2.1 pad.1@1055,2890 U2.8 | length 2507.2
  Top Layer w10: v1@1433.91,2243.44 ccw(c1454.59,2254) 1448.58,2231.58 ; v1(1435,2244) 1443.71,2244 1498.86,2188.86 ; U2.8@1521.6,2169.8 1502.54,2188.86 1498.86,2188.86 ; 1498.86,2188.86 cw(c1498.86,2178.87) U2.8@1507.46,2183.94 ; 1498.86,2188.86 cw(c1498.86,2178.87) U2.8@1507.46,2183.94 ; 1501.17,2186.55 ccw(c1507.46,2192.84) U2.8@1507.46,2183.94 ; 1501.17,2186.55 ccw(c1507.46,2192.84) U2.8@1507.46,2183.94 ; 1501.17,2186.55 ccw(c1507.46,2192.84) U2.8@1507.46,2183.94 ; 1501.17,2186.55 ccw(c1507.46,2192.84) U2.8@1507.46,2183.94 ; v1@1435,2235.22 cw(c1435,2192.99) 1464.86,2222.85 ccw(c1435,2192.99) v1@1435,2235.22
  Bottom Layer w10: pad.1@1055,2890 P2.1@1140,2890 1241,2789 1241,2284 1275,2250 1281,2244 v1(1435,2244) ; P2.1@1116.78,2882.1 ccw(c1095.78,2874.96) 1101.52,2896.39 ccw(c1105.72,2912.07) P2.1@1119.38,2903.28 ; P2.1@1116.78,2897.9 cw(c1095.78,2905.04) 1101.52,2883.61 cw(c1105.72,2867.93) P2.1@1119.38,2876.72 ; P2.1@1134.64,2888.9 ccw(c1172.3,2896.61) 1162.35,2859.48 ; P2.1@1141.1,2895.36 cw(c1133.39,2857.7) 1170.52,2867.65 ; pad.1@1080.79,2890 cw(c1080.79,2830.79) 1122.66,2872.66 ccw(c1080.79,2830.79) pad.1@1080.79,2890 ; pad.1@1080.79,2890 ccw(c1080.79,2949.21) 1122.66,2907.34 cw(c1080.79,2949.21) pad.1@1080.79,2890 ; pad.1@1086.36,2877.01 cw(c1099.56,2868.97) 1103.56,2883.9 ; pad.1@1086.36,2877.01 cw(c1099.56,2868.97) 1103.56,2883.9 ; pad.1@1086.36,2877.01 cw(c1099.56,2868.97) 1103.56,2883.9 ; pad.1@1086.36,2902.99 ccw(c1099.56,2911.03) 1103.56,2896.1 ; pad.1@1086.36,2902.99 ccw(c1099.56,2911.03) 1103.56,2896.1 ; pad.1@1086.36,2902.99 ccw(c1099.56,2911.03) 1103.56,2896.1 ; pad.1@1088.73,2882.12 cw(c1109.12,2875.35) 1103.56,2896.1 ; pad.1@1088.73,2882.12 cw(c1109.12,2875.35) 1103.56,2896.1 ; pad.1@1088.73,2882.12 cw(c1109.12,2875.35) 1103.56,2896.1 ; pad.1@1088.73,2897.88 ccw(c1109.12,2904.65) 1103.56,2883.9 ; pad.1@1088.73,2897.88 ccw(c1109.12,2904.65) 1103.56,2883.9 ; pad.1@1088.73,2897.88 ccw(c1109.12,2904.65) 1103.56,2883.9 ; 1101.21,2890 cw(c1101.21,2926.21) 1075.61,2900.61 ccw(c1101.21,2926.21) 1101.21,2890 ; 1101.21,2890 ccw(c1101.21,2853.79) 1075.61,2879.39 cw(c1101.21,2853.79) 1101.21,2890 ; 1104.93,2890 cw(c1104.93,2854.93) 1129.73,2879.73 ccw(c1104.93,2854.93) 1104.93,2890 ; 1104.93,2890 ccw(c1104.93,2925.07) 1129.73,2900.27 cw(c1104.93,2925.07) 1104.93,2890 ; P2.1@1125.36,2890 cw(c1125.36,2950.36) 1082.68,2907.68 ccw(c1125.36,2950.36) P2.1@1125.36,2890 ; P2.1@1125.36,2890 ccw(c1125.36,2829.64) 1082.68,2872.32 cw(c1125.36,2829.64) P2.1@1125.36,2890 ; P2.1@1164.8,2865.2 cw(c1189.6,2890) 1154.53,2890 ccw(c1189.6,2890) P2.1@1164.8,2865.2 ; P2.1@1164.8,2865.2 ccw(c1140,2840.4) 1140,2875.47 cw(c1140,2840.4) P2.1@1164.8,2865.2 ; 1181.87,2848.13 cw(c1223.74,2890) 1164.53,2890 ccw(c1223.74,2890) 1181.87,2848.13 ; 1181.87,2848.13 ccw(c1140,2806.26) 1140,2865.47 cw(c1140,2806.26) 1181.87,2848.13
PC1: P2.2 pad.1@1055,2790 U2.9 | length 2401.1
  Top Layer w10: v1(1429.78,2210) 1435.8,2203.98 1460,2203.98 ; U2.9@1507.68,2155.88 1507.68,2156.3 1460,2203.98 ; 1460,2203.98 cw(c1460,2233.45) 1436.72,2215.38 ccw(c1460,2233.45) 1460,2203.98
  Bottom Layer w10: pad.1@1055,2790 P2.2@1140,2790 1222.5,2707.5 1222.5,2275.13 1282.41,2215.22 1287.63,2210 v1(1429.78,2210) ; P2.2@1116.78,2782.1 ccw(c1095.78,2774.96) 1101.52,2796.39 ccw(c1105.72,2812.07) P2.2@1119.38,2803.28 ; P2.2@1116.78,2797.9 cw(c1095.78,2805.04) 1101.52,2783.61 cw(c1105.72,2767.93) P2.2@1119.38,2776.72 ; P2.2@1134.64,2788.9 ccw(c1172.3,2796.61) 1162.35,2759.48 ; P2.2@1141.1,2795.36 cw(c1133.39,2757.7) 1170.52,2767.65 ; pad.1@1080.79,2790 cw(c1080.79,2730.79) 1122.66,2772.66 ccw(c1080.79,2730.79) pad.1@1080.79,2790 ; pad.1@1080.79,2790 ccw(c1080.79,2849.21) 1122.66,2807.34 cw(c1080.79,2849.21) pad.1@1080.79,2790 ; pad.1@1086.36,2777.01 cw(c1099.56,2768.97) 1103.56,2783.9 ; pad.1@1086.36,2777.01 cw(c1099.56,2768.97) 1103.56,2783.9 ; pad.1@1086.36,2777.01 cw(c1099.56,2768.97) 1103.56,2783.9 ; pad.1@1086.36,2802.99 ccw(c1099.56,2811.03) 1103.56,2796.1 ; pad.1@1086.36,2802.99 ccw(c1099.56,2811.03) 1103.56,2796.1 ; pad.1@1086.36,2802.99 ccw(c1099.56,2811.03) 1103.56,2796.1 ; pad.1@1088.73,2782.12 cw(c1109.12,2775.35) 1103.56,2796.1 ; pad.1@1088.73,2782.12 cw(c1109.12,2775.35) 1103.56,2796.1 ; pad.1@1088.73,2782.12 cw(c1109.12,2775.35) 1103.56,2796.1 ; pad.1@1088.73,2797.88 ccw(c1109.12,2804.65) 1103.56,2783.9 ; pad.1@1088.73,2797.88 ccw(c1109.12,2804.65) 1103.56,2783.9 ; pad.1@1088.73,2797.88 ccw(c1109.12,2804.65) 1103.56,2783.9 ; 1101.21,2790 cw(c1101.21,2826.21) 1075.61,2800.61 ccw(c1101.21,2826.21) 1101.21,2790 ; 1101.21,2790 ccw(c1101.21,2753.79) 1075.61,2779.39 cw(c1101.21,2753.79) 1101.21,2790 ; 1104.93,2790 cw(c1104.93,2754.93) 1129.73,2779.73 ccw(c1104.93,2754.93) 1104.93,2790 ; 1104.93,2790 ccw(c1104.93,2825.07) 1129.73,2800.27 cw(c1104.93,2825.07) 1104.93,2790 ; P2.2@1125.36,2790 cw(c1125.36,2850.36) 1082.68,2807.68 ccw(c1125.36,2850.36) P2.2@1125.36,2790 ; P2.2@1125.36,2790 ccw(c1125.36,2729.64) 1082.68,2772.32 cw(c1125.36,2729.64) P2.2@1125.36,2790 ; 1164.8,2765.2 cw(c1189.6,2790) 1154.53,2790 ccw(c1189.6,2790) 1164.8,2765.2 ; 1164.8,2765.2 ccw(c1140,2740.4) 1140,2775.47 cw(c1140,2740.4) 1164.8,2765.2 ; 1181.87,2748.13 cw(c1223.74,2790) 1164.53,2790 ccw(c1223.74,2790) 1181.87,2748.13 ; 1181.87,2748.13 ccw(c1140,2706.26) 1140,2765.47 cw(c1140,2706.26) 1181.87,2748.13 ; 1408.58,2210 cw(c1408.58,2188.8) 1423.57,2203.79 ccw(c1408.58,2188.8) 1408.58,2210 ; 1408.58,2210 ccw(c1408.58,2231.2) 1423.57,2216.21 cw(c1408.58,2231.2) 1408.58,2210
PC2: P2.3 pad.1@1055,2690 U2.10 | length 2325.1
  Top Layer w10: v1@1456.79,2178.94 U2.10@1493.76,2141.96
  Bottom Layer w10: pad.1@1055,2690 P2.3@1140,2690 1205,2625 1205,2270 1275.78,2199.22 1293.06,2181.94 1433.06,2181.94 ; P2.3@1116.78,2682.1 ccw(c1095.78,2674.96) 1101.52,2696.39 ccw(c1105.72,2712.07) P2.3@1119.38,2703.28 ; P2.3@1116.78,2697.9 cw(c1095.78,2705.04) 1101.52,2683.61 cw(c1105.72,2667.93) P2.3@1119.38,2676.72 ; P2.3@1134.64,2688.9 ccw(c1172.3,2696.61) 1162.35,2659.48 ; P2.3@1141.1,2695.36 cw(c1133.39,2657.7) 1170.52,2667.65 ; v1(1450,2178.94) 1447,2181.94 1433.06,2181.94 ; pad.1@1080.79,2690 cw(c1080.79,2630.79) 1122.66,2672.66 ccw(c1080.79,2630.79) pad.1@1080.79,2690 ; pad.1@1080.79,2690 ccw(c1080.79,2749.21) 1122.66,2707.34 cw(c1080.79,2749.21) pad.1@1080.79,2690 ; pad.1@1086.36,2677.01 cw(c1099.56,2668.97) 1103.56,2683.9 ; pad.1@1086.36,2677.01 cw(c1099.56,2668.97) 1103.56,2683.9 ; pad.1@1086.36,2677.01 cw(c1099.56,2668.97) 1103.56,2683.9 ; pad.1@1086.36,2702.99 ccw(c1099.56,2711.03) 1103.56,2696.1 ; pad.1@1086.36,2702.99 ccw(c1099.56,2711.03) 1103.56,2696.1 ; pad.1@1086.36,2702.99 ccw(c1099.56,2711.03) 1103.56,2696.1 ; pad.1@1088.73,2682.12 cw(c1109.12,2675.35) 1103.56,2696.1 ; pad.1@1088.73,2682.12 cw(c1109.12,2675.35) 1103.56,2696.1 ; pad.1@1088.73,2682.12 cw(c1109.12,2675.35) 1103.56,2696.1 ; pad.1@1088.73,2697.88 ccw(c1109.12,2704.65) 1103.56,2683.9 ; pad.1@1088.73,2697.88 ccw(c1109.12,2704.65) 1103.56,2683.9 ; pad.1@1088.73,2697.88 ccw(c1109.12,2704.65) 1103.56,2683.9 ; 1101.21,2690 cw(c1101.21,2726.21) 1075.61,2700.61 ccw(c1101.21,2726.21) 1101.21,2690 ; 1101.21,2690 ccw(c1101.21,2653.79) 1075.61,2679.39 cw(c1101.21,2653.79) 1101.21,2690 ; 1104.93,2690 cw(c1104.93,2654.93) 1129.73,2679.73 ccw(c1104.93,2654.93) 1104.93,2690 ; 1104.93,2690 ccw(c1104.93,2725.07) 1129.73,2700.27 cw(c1104.93,2725.07) 1104.93,2690 ; P2.3@1125.36,2690 cw(c1125.36,2750.36) 1082.68,2707.68 ccw(c1125.36,2750.36) P2.3@1125.36,2690 ; P2.3@1125.36,2690 ccw(c1125.36,2629.64) 1082.68,2672.32 cw(c1125.36,2629.64) P2.3@1125.36,2690 ; 1164.8,2665.2 cw(c1189.6,2690) 1154.53,2690 ccw(c1189.6,2690) 1164.8,2665.2 ; 1164.8,2665.2 ccw(c1140,2640.4) 1140,2675.47 cw(c1140,2640.4) 1164.8,2665.2 ; 1181.87,2648.13 cw(c1223.74,2690) 1164.53,2690 ccw(c1223.74,2690) 1181.87,2648.13 ; 1181.87,2648.13 ccw(c1140,2606.26) 1140,2665.47 cw(c1140,2606.26) 1181.87,2648.13 ; 1433.06,2181.94 cw(c1433.06,2172.65) v1@1441.77,2175.88 ; 1433.06,2181.94 cw(c1433.06,2172.65) v1@1441.77,2175.88 ; 1433.06,2181.94 cw(c1433.06,2172.65) v1@1441.77,2175.88 ; 1433.06,2181.94 cw(c1433.06,2172.65) v1@1441.77,2175.88 ; 1436.06,2181.94 ccw(c1436.06,2192.88) v1@1443.79,2185.15 ; 1436.06,2181.94 ccw(c1436.06,2192.88) v1@1443.79,2185.15 ; 1436.06,2181.94 ccw(c1436.06,2192.88) v1@1443.79,2185.15 ; 1436.06,2181.94 ccw(c1436.06,2192.88) v1@1443.79,2185.15 ; 1436.06,2181.94 ccw(c1436.06,2192.88) v1@1443.79,2185.15 ; 1436.06,2181.94 ccw(c1436.06,2192.88) v1@1443.79,2185.15 ; 1421.55,2181.94 cw(c1421.55,2150.49) 1443.79,2172.73 ccw(c1421.55,2150.49) 1421.55,2181.94
PC3: P2.4 pad.1@1055,2590 U2.11 | length 2228.7
  Top Layer w10: v2@1418.05,2160 v2(1417.18,2159.13) 1422.15,2154.16 1453.73,2154.16 U2.11@1479.84,2128.04 ; v2@1422.59,2154.99 cw(c1429.4,2149.76) 1433.69,2157.2 ; v2@1422,2163.95 ccw(c1445.63,2187.58) 1445.63,2154.16 cw(c1445.63,2187.58) v2@1422,2163.95
  Bottom Layer w10: pad.1@1055,2590 P2.4@1140,2590 1185,2545 1185,2242.63 1267.63,2160 1420,2160 1419.13,2159.13 v2(1417.18,2159.13) ; P2.4@1116.78,2582.1 ccw(c1095.78,2574.96) 1101.52,2596.39 ccw(c1105.72,2612.07) P2.4@1119.38,2603.28 ; P2.4@1116.78,2597.9 cw(c1095.78,2605.04) 1101.52,2583.61 cw(c1105.72,2567.93) P2.4@1119.38,2576.72 ; P2.4@1134.64,2588.9 ccw(c1172.3,2596.61) 1162.35,2559.48 ; P2.4@1141.1,2595.36 cw(c1133.39,2557.7) 1170.52,2567.65 ; pad.1@1080.79,2590 cw(c1080.79,2530.79) 1122.66,2572.66 ccw(c1080.79,2530.79) pad.1@1080.79,2590 ; pad.1@1080.79,2590 ccw(c1080.79,2649.21) 1122.66,2607.34 cw(c1080.79,2649.21) pad.1@1080.79,2590 ; pad.1@1086.36,2577.01 cw(c1099.56,2568.97) 1103.56,2583.9 ; pad.1@1086.36,2577.01 cw(c1099.56,2568.97) 1103.56,2583.9 ; pad.1@1086.36,2577.01 cw(c1099.56,2568.97) 1103.56,2583.9 ; pad.1@1086.36,2602.99 ccw(c1099.56,2611.03) 1103.56,2596.1 ; pad.1@1086.36,2602.99 ccw(c1099.56,2611.03) 1103.56,2596.1 ; pad.1@1086.36,2602.99 ccw(c1099.56,2611.03) 1103.56,2596.1 ; pad.1@1088.73,2582.12 cw(c1109.12,2575.35) 1103.56,2596.1 ; pad.1@1088.73,2582.12 cw(c1109.12,2575.35) 1103.56,2596.1 ; pad.1@1088.73,2582.12 cw(c1109.12,2575.35) 1103.56,2596.1 ; pad.1@1088.73,2597.88 ccw(c1109.12,2604.65) 1103.56,2583.9 ; pad.1@1088.73,2597.88 ccw(c1109.12,2604.65) 1103.56,2583.9 ; pad.1@1088.73,2597.88 ccw(c1109.12,2604.65) 1103.56,2583.9 ; 1101.21,2590 cw(c1101.21,2626.21) 1075.61,2600.61 ccw(c1101.21,2626.21) 1101.21,2590 ; 1101.21,2590 ccw(c1101.21,2553.79) 1075.61,2579.39 cw(c1101.21,2553.79) 1101.21,2590 ; 1104.93,2590 cw(c1104.93,2554.93) 1129.73,2579.73 ccw(c1104.93,2554.93) 1104.93,2590 ; 1104.93,2590 ccw(c1104.93,2625.07) 1129.73,2600.27 cw(c1104.93,2625.07) 1104.93,2590 ; P2.4@1125.36,2590 cw(c1125.36,2650.36) 1082.68,2607.68 ccw(c1125.36,2650.36) P2.4@1125.36,2590 ; P2.4@1125.36,2590 ccw(c1125.36,2529.64) 1082.68,2572.32 cw(c1125.36,2529.64) P2.4@1125.36,2590 ; 1164.8,2565.2 cw(c1189.6,2590) 1154.53,2590 ccw(c1189.6,2590) 1164.8,2565.2 ; 1164.8,2565.2 ccw(c1140,2540.4) 1140,2575.47 cw(c1140,2540.4) 1164.8,2565.2 ; 1181.87,2548.13 cw(c1223.74,2590) 1164.53,2590 ccw(c1223.74,2590) 1181.87,2548.13 ; 1181.87,2548.13 ccw(c1140,2506.26) 1140,2565.47 cw(c1140,2506.26) 1181.87,2548.13 ; 1398.64,2160 cw(c1398.64,2140.59) 1412.37,2154.31 ccw(c1398.64,2140.59) 1398.64,2160 ; 1402.84,2160 ccw(c1402.84,2173.48) 1412.37,2163.95 cw(c1402.84,2173.48) 1402.84,2160
PC4: P2.5 pad.1@1055,2490 U2.24 | length 2669.4
  Top Layer w10: P2.5@1134.64,2488.9 ccw(c1172.3,2496.61) 1162.35,2459.48 ; P2.5@1140,2490 1201,2429 1201,1939 1235,1905 v1(1235,1835) ; P2.5@1141.1,2495.36 cw(c1133.39,2457.7) 1170.52,2467.65 ; v2(1470,1800) 1505.73,1835.73 U2.24@1507.68,1835.73 ; 1164.8,2465.2 cw(c1189.6,2490) 1154.53,2490 ccw(c1189.6,2490) 1164.8,2465.2 ; 1164.8,2465.2 ccw(c1140,2440.4) 1140,2475.47 cw(c1140,2440.4) 1164.8,2465.2 ; 1181.87,2448.13 cw(c1223.74,2490) 1164.53,2490 ccw(c1223.74,2490) 1181.87,2448.13 ; 1181.87,2448.13 ccw(c1140,2406.26) 1140,2465.47 cw(c1140,2406.26) 1181.87,2448.13 ; 1235,1856.2 cw(c1213.8,1856.2) 1228.79,1841.21 ccw(c1213.8,1856.2) 1235,1856.2 ; 1235,1856.2 ccw(c1256.2,1856.2) 1241.21,1841.21 cw(c1256.2,1856.2) 1235,1856.2 ; 1481.63,1811.63 cw(c1470,1823.25) 1470,1806.81 ccw(c1470,1823.25) 1481.63,1811.63 ; 1481.63,1811.63 ccw(c1493.25,1800) 1476.81,1800 cw(c1493.25,1800) 1481.63,1811.63
  Bottom Layer w10: pad.1@1055,2490 P2.5@1140,2490 1145,2485 P2.5@1145,2470 ; P2.5@1116.78,2482.1 ccw(c1095.78,2474.96) 1101.52,2496.39 ccw(c1105.72,2512.07) P2.5@1119.38,2503.28 ; P2.5@1116.78,2497.9 cw(c1095.78,2505.04) 1101.52,2483.61 cw(c1105.72,2467.93) P2.5@1119.38,2476.72 ; v1(1235,1835) 1275,1795 1465,1795 v2(1470,1800) ; 1453.45,1798.04 cw(c1457.77,1790.56) v2@1464.61,1795.84 ; pad.1@1080.79,2490 cw(c1080.79,2430.79) 1122.66,2472.66 ccw(c1080.79,2430.79) pad.1@1080.79,2490 ; pad.1@1080.79,2490 ccw(c1080.79,2549.21) 1122.66,2507.34 cw(c1080.79,2549.21) pad.1@1080.79,2490 ; pad.1@1086.36,2477.01 cw(c1099.56,2468.97) 1103.56,2483.9 ; pad.1@1086.36,2477.01 cw(c1099.56,2468.97) 1103.56,2483.9 ; pad.1@1086.36,2477.01 cw(c1099.56,2468.97) 1103.56,2483.9 ; pad.1@1086.36,2502.99 ccw(c1099.56,2511.03) 1103.56,2496.1 ; pad.1@1086.36,2502.99 ccw(c1099.56,2511.03) 1103.56,2496.1 ; pad.1@1086.36,2502.99 ccw(c1099.56,2511.03) 1103.56,2496.1 ; pad.1@1088.73,2482.12 cw(c1109.12,2475.35) 1103.56,2496.1 ; pad.1@1088.73,2482.12 cw(c1109.12,2475.35) 1103.56,2496.1 ; pad.1@1088.73,2482.12 cw(c1109.12,2475.35) 1103.56,2496.1 ; pad.1@1088.73,2497.88 ccw(c1109.12,2504.65) 1103.56,2483.9 ; pad.1@1088.73,2497.88 ccw(c1109.12,2504.65) 1103.56,2483.9 ; pad.1@1088.73,2497.88 ccw(c1109.12,2504.65) 1103.56,2483.9 ; 1101.21,2490 cw(c1101.21,2526.21) 1075.61,2500.61 ccw(c1101.21,2526.21) 1101.21,2490 ; 1101.21,2490 ccw(c1101.21,2453.79) 1075.61,2479.39 cw(c1101.21,2453.79) 1101.21,2490 ; 1104.93,2490 cw(c1104.93,2454.93) 1129.73,2479.73 ccw(c1104.93,2454.93) 1104.93,2490 ; 1104.93,2490 ccw(c1104.93,2525.07) 1129.73,2500.27 cw(c1104.93,2525.07) 1104.93,2490 ; P2.5@1125.36,2490 cw(c1125.36,2550.36) 1082.68,2507.68 ccw(c1125.36,2550.36) P2.5@1125.36,2490 ; P2.5@1125.36,2490 ccw(c1125.36,2429.64) 1082.68,2472.32 cw(c1125.36,2429.64) P2.5@1125.36,2490 ; 1249.99,1820.01 cw(c1264.98,1835) 1243.78,1835 ccw(c1264.98,1835) 1249.99,1820.01 ; 1249.99,1820.01 ccw(c1235,1805.02) 1235,1826.22 cw(c1235,1805.02) 1249.99,1820.01 ; 1441.49,1795 ccw(c1441.49,1828.51) 1465.18,1804.82 cw(c1441.49,1828.51) 1441.49,1795
PC5: P2.6 pad.1@1055,2390 U2.25 | length 2761.9
  Top Layer w10: P2.6@1134.64,2388.9 ccw(c1172.3,2396.61) 1162.35,2359.48 ; P2.6@1140,2390 1185,2345 1185,1867.63 1201,1851.63 1201,1804 1240,1765 ; P2.6@1141.1,2395.36 cw(c1133.39,2357.7) 1170.52,2367.65 ; 1240.27,1777.73 cw(c1233.53,1752.61) v1@1256.06,1765.61 ; v1@1246.79,1761.88 ccw(c1237.87,1758.48) 1240.34,1767.71 ccw(c1242.23,1774.75) v1@1248.02,1770.33 ; v1(1255,1765) 1240,1765 ; v1@1450,1765 1469.45,1765 ; U2.25@1521.6,1821.81 1500,1800.21 1500,1795.55 1469.45,1765 ; 1164.8,2365.2 cw(c1189.6,2390) 1154.53,2390 ccw(c1189.6,2390) 1164.8,2365.2 ; 1164.8,2365.2 ccw(c1140,2340.4) 1140,2375.47 cw(c1140,2340.4) 1164.8,2365.2 ; 1181.87,2348.13 cw(c1223.74,2390) 1164.53,2390 ccw(c1223.74,2390) 1181.87,2348.13 ; 1181.87,2348.13 ccw(c1140,2306.26) 1140,2365.47 cw(c1140,2306.26) 1181.87,2348.13 ; 1240,1765 cw(c1240,1756.58) 1247.34,1760.7 ccw(c1240,1756.58) 1240,1765 ; 1240,1765 ccw(c1240,1773.42) 1247.34,1769.3 cw(c1240,1773.42) 1240,1765 ; 1469.45,1765 cw(c1469.45,1779.15) 1457.45,1771.65 ccw(c1469.45,1779.15) 1469.45,1765 ; 1214.41,1790.59 ccw(c1255,1831.19) 1255,1773.78 cw(c1255,1831.19) 1214.41,1790.59 ; 1231.48,1773.52 ccw(c1255,1797.05) 1255,1763.78 cw(c1255,1797.05) 1231.48,1773.52 ; v1@1456.21,1760.79 cw(c1466.37,1750.63) 1466.37,1765 ccw(c1466.37,1750.63) v1@1456.21,1760.79
  Bottom Layer w10: pad.1@1055,2390 P2.6@1140,2390 ; P2.6@1116.78,2382.1 ccw(c1095.78,2374.96) 1101.52,2396.39 ccw(c1105.72,2412.07) P2.6@1119.38,2403.28 ; P2.6@1116.78,2397.9 cw(c1095.78,2405.04) 1101.52,2383.61 cw(c1105.72,2367.93) P2.6@1119.38,2376.72 ; v1(1255,1765) v1@1440,1765 ; pad.1@1080.79,2390 cw(c1080.79,2330.79) 1122.66,2372.66 ccw(c1080.79,2330.79) pad.1@1080.79,2390 ; pad.1@1080.79,2390 ccw(c1080.79,2449.21) 1122.66,2407.34 cw(c1080.79,2449.21) pad.1@1080.79,2390 ; pad.1@1086.36,2377.01 cw(c1099.56,2368.97) 1103.56,2383.9 ; pad.1@1086.36,2377.01 cw(c1099.56,2368.97) 1103.56,2383.9 ; pad.1@1086.36,2377.01 cw(c1099.56,2368.97) 1103.56,2383.9 ; pad.1@1086.36,2402.99 ccw(c1099.56,2411.03) 1103.56,2396.1 ; pad.1@1086.36,2402.99 ccw(c1099.56,2411.03) 1103.56,2396.1 ; pad.1@1086.36,2402.99 ccw(c1099.56,2411.03) 1103.56,2396.1 ; pad.1@1088.73,2382.12 cw(c1109.12,2375.35) 1103.56,2396.1 ; pad.1@1088.73,2382.12 cw(c1109.12,2375.35) 1103.56,2396.1 ; pad.1@1088.73,2382.12 cw(c1109.12,2375.35) 1103.56,2396.1 ; pad.1@1088.73,2397.88 ccw(c1109.12,2404.65) 1103.56,2383.9 ; pad.1@1088.73,2397.88 ccw(c1109.12,2404.65) 1103.56,2383.9 ; pad.1@1088.73,2397.88 ccw(c1109.12,2404.65) 1103.56,2383.9 ; 1101.21,2390 cw(c1101.21,2426.21) 1075.61,2400.61 ccw(c1101.21,2426.21) 1101.21,2390 ; 1101.21,2390 ccw(c1101.21,2353.79) 1075.61,2379.39 cw(c1101.21,2353.79) 1101.21,2390 ; 1104.93,2390 cw(c1104.93,2354.93) 1129.73,2379.73 ccw(c1104.93,2354.93) 1104.93,2390 ; 1104.93,2390 ccw(c1104.93,2425.07) 1129.73,2400.27 cw(c1104.93,2425.07) 1104.93,2390 ; P2.6@1125.36,2390 cw(c1125.36,2450.36) 1082.68,2407.68 ccw(c1125.36,2450.36) P2.6@1125.36,2390 ; P2.6@1125.36,2390 ccw(c1125.36,2329.64) 1082.68,2372.32 cw(c1125.36,2329.64) P2.6@1125.36,2390 ; 1276.2,1765 cw(c1276.2,1786.2) 1261.21,1771.21 ccw(c1276.2,1786.2) 1276.2,1765 ; 1276.2,1765 ccw(c1276.2,1743.8) 1261.21,1758.79 cw(c1276.2,1743.8) 1276.2,1765 ; 1423.98,1765 ccw(c1423.98,1793.02) 1443.79,1773.21 cw(c1423.98,1793.02) 1423.98,1765 ; 1433.63,1765 cw(c1433.63,1750.63) 1443.79,1760.79 ccw(c1433.63,1750.63) 1433.63,1765
  other v1: 1450,1767